# EAGLE board power_supply (EAGLE 9.1.3)
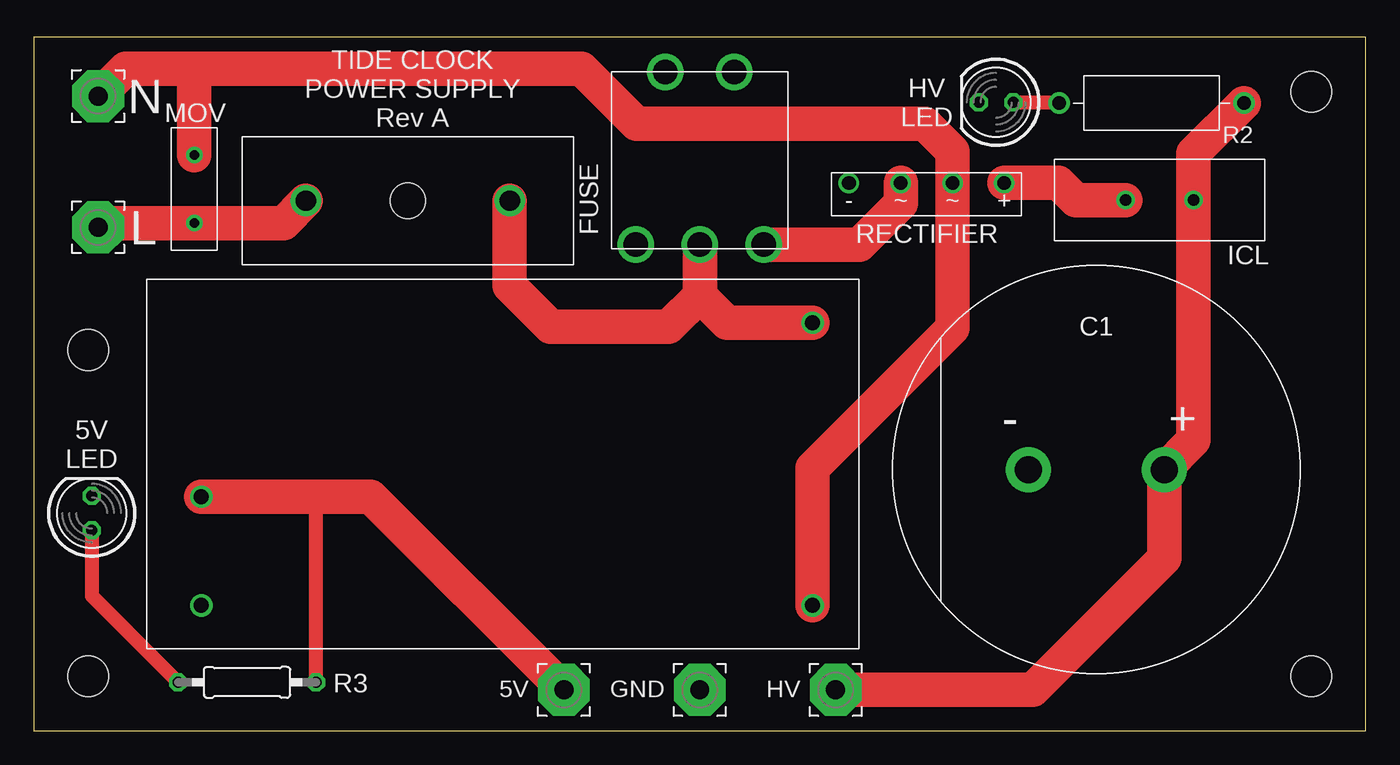
[diagram p0: board, top side]
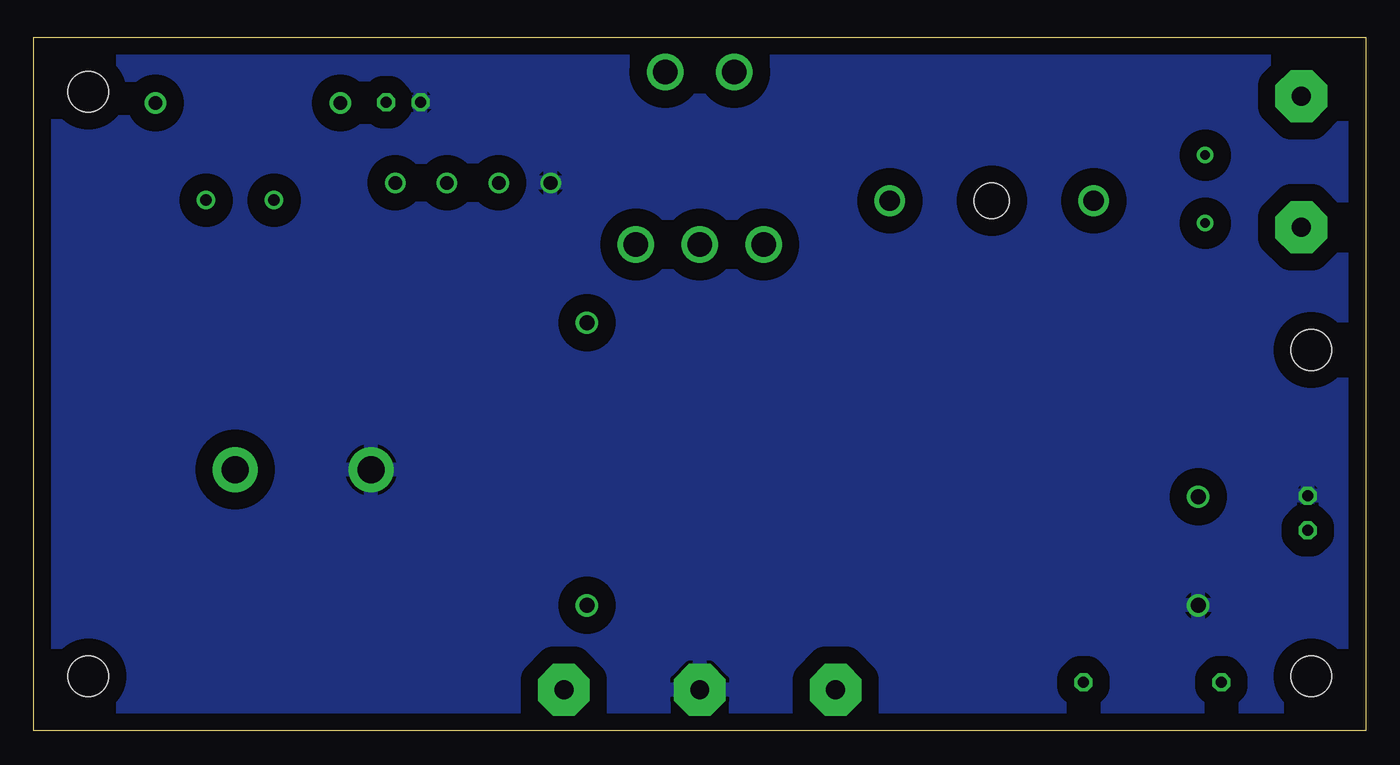
[diagram p1: board, bottom side, seen from below]

Size 98 x 51 mm. Coordinates in mm from the lower left corner, seen from the top.
Outline: 0,0 98,0 98,51 0,51 0,0
Copper layers (1*16): Top 0.035mm / dielectric 1.5mm / Bottom 0.035mm
Design rules "default": minimum track width 6mil, minimum drill 0.35mm, track to track 6mil, track to pad 6mil, pad to pad 6mil, via to via 6mil, smd to smd 6mil, copper to edge 40mil, drill to drill 6mil, minimum pad ring 10mil, minimum via ring 8mil, stop-mask expansion 4mil, vias tented up to drill 0mil, thermal gap 10mil
Holes 3 mm at 94,4 94,47 4,4 4,28

## Footprints (pad centres in the part's own frame; a part is rotated, then mirrored left to right if it is on the bottom)
3,81/1,4 = drill 1.397 pad 3.81 octagon: 1 0,0
CAPPRD1000W200D3000H3000B = drill 2 pad 3.3: + 5,0; - -5,0
UG6KB100TB = drill 1: + 11.43,0; - 0,0; AC1 3.81,0; AC2 7.62,0
20MM_FUSEHOLDER = drill 1.5: P$1 -7.5,0; P$2 7.5,0 | hole 2.6: 0,0
LED5MM = drill 0.813 octagon: A -1.27,0; K 1.27,0
IRM-15-5 = drill 1.1: + 48.4,-11.2; - 48.4,-3.2; L 3.4,-24; N 3.4,-3.2
MF72-030D13 = drill 0.85: P$1 -2.5,0; P$2 2.5,0
RESAD1360W80L900D350B = drill 1 pad 1.6: 1 -6.8,0; 2 6.8,0
0207/10 = drill 0.813 octagon: 1 -5.08,0; 2 5.08,0
M2013S2A2W30 = drill 1.8: 1 4.7,12.7; 2 0,12.7; 3 -4.7,12.7; 4 -2.54,0; 5 2.54,0
MOV-07D201K = drill 0.7: P$1 -2.5,0; P$2 2.5,0

## Placement (x,y rotation side)
5V  WIREPAD3,81/1,4  [3,81/1,4]  39,3 180 top
C1  ESMQ201VSN122MR30S  [CAPPRD1000W200D3000H3000B]  78.19,19.2 0 top
D1  UG6KB100TB  [UG6KB100TB]  59.98,40.3 0 top
F1  20MM_FUSEHOLDER  [20MM_FUSEHOLDER]  27.51,38.98 0 top
GND  WIREPAD3,81/1,4  [3,81/1,4]  49,3 180 top
HV  WIREPAD3,81/1,4  [3,81/1,4]  59,3 180 top
L  WIREPAD3,81/1,4  [3,81/1,4]  4.72,37.03 180 top
LED1  [LED5MM]  70.8,46.23 180 top
LED2  [LED5MM]  4.25,16 90 top
M1  IRM-15-5  [IRM-15-5]  60.71,6.01 180 top
N  WIREPAD3,81/1,4  [3,81/1,4]  4.72,46.68 180 top
R1  MF72-030D13  [MF72-030D13]  82.84,39.03 0 top
R2  RR02J20KTB  [RESAD1360W80L900D350B]  82.25,46.17 0 top
R3  [0207/10]  15.68,3.56 0 top
SW1  M2013S2A2W30  [M2013S2A2W30]  49,48.46 180 top
V1  MOV-07D201K  [MOV-07D201K]  11.8,39.84 270 top

## Library data of the parts
5V GND HV L N = wirepad
C1 D1 F1 M1 R1 R2 SW1 V1 = tide_clock
LED1 LED2 = led
R3 = resistor

## Nets
GND: C1.- D1.- GND.1 LED1.K LED2.K M1.-
N$1: D1.+ R1.P$1
N$2: C1.+ HV.1 R1.P$2 R2.2
N$3: F1.P$2 M1.L SW1.2
N$4: F1.P$1 L.1 V1.P$2
N$5: D1.AC1 SW1.3
N$6: 5V.1 M1.+ R3.2
N$7: LED1.A R2.1
N$8: D1.AC2 M1.N N.1 V1.P$1
N$9: LED2.A R3.1

## Tracks (layer width: path | path; a pad name or v marks a point on that pad's centre or on a via)
GND
  pour Bottom (isolate 1.27): 0,0 98,0 98,53 0,53
N$1
  Top 2.54: R1.P$1 76.68,39.03 75.41,40.3 D1.+
N$2
  Top 2.54: R2.2 85.34,42.46 R1.P$2 85.34,21.35 C1.+ 83.19,12.68 73.51,3 HV.1
N$3
  Top 2.54: SW1.2 49,32 | M1.L 50.99,30.01 49,32 | F1.P$2 35.01,32.75 38.04,29.72 46.72,29.72 49,32
N$4
  Top 2.54: F1.P$1 18.36,37.34 V1.P$2 5.03,37.34 L.1
N$5
  Top 2.54: D1.AC1 63.79,38.79 60.76,35.76 SW1.3
N$6
  Top 1.016: R3.2 20.76,17.21
  Top 2.54: 5V.1 24.79,17.21 20.76,17.21 M1.+
N$7
  Top 1.016: LED1.A 75.4,46.23 R2.1
N$8
  Top 2.54: M1.N 57.31,19.31 67.6,29.6 D1.AC2 67.6,42.64 65.59,44.65 44.35,44.65 40.29,48.71 11.87,48.71 | N.1 6.75,48.71 11.87,48.71 | V1.P$1 11.8,48.64 11.87,48.71
N$9
  Top 1.016: LED2.A 4.25,9.91 R3.1

## Text on the board
tNames: TIDE CLOCK / POWER SUPPLY / Rev A | HV / LED | MOV | FUSE | RECTIFIER | ICL | 5V / LED